# Altium PCB PlacaVGA.PcbDoc
Units mm, origin at the board's own origin, x right, y up, seen from the top; angles counter-clockwise.
Board outline 100 x 50 mm, 2 copper layers (Top Layer, Bottom Layer); 26 components, 19 nets, 97 pads, 6 vias.
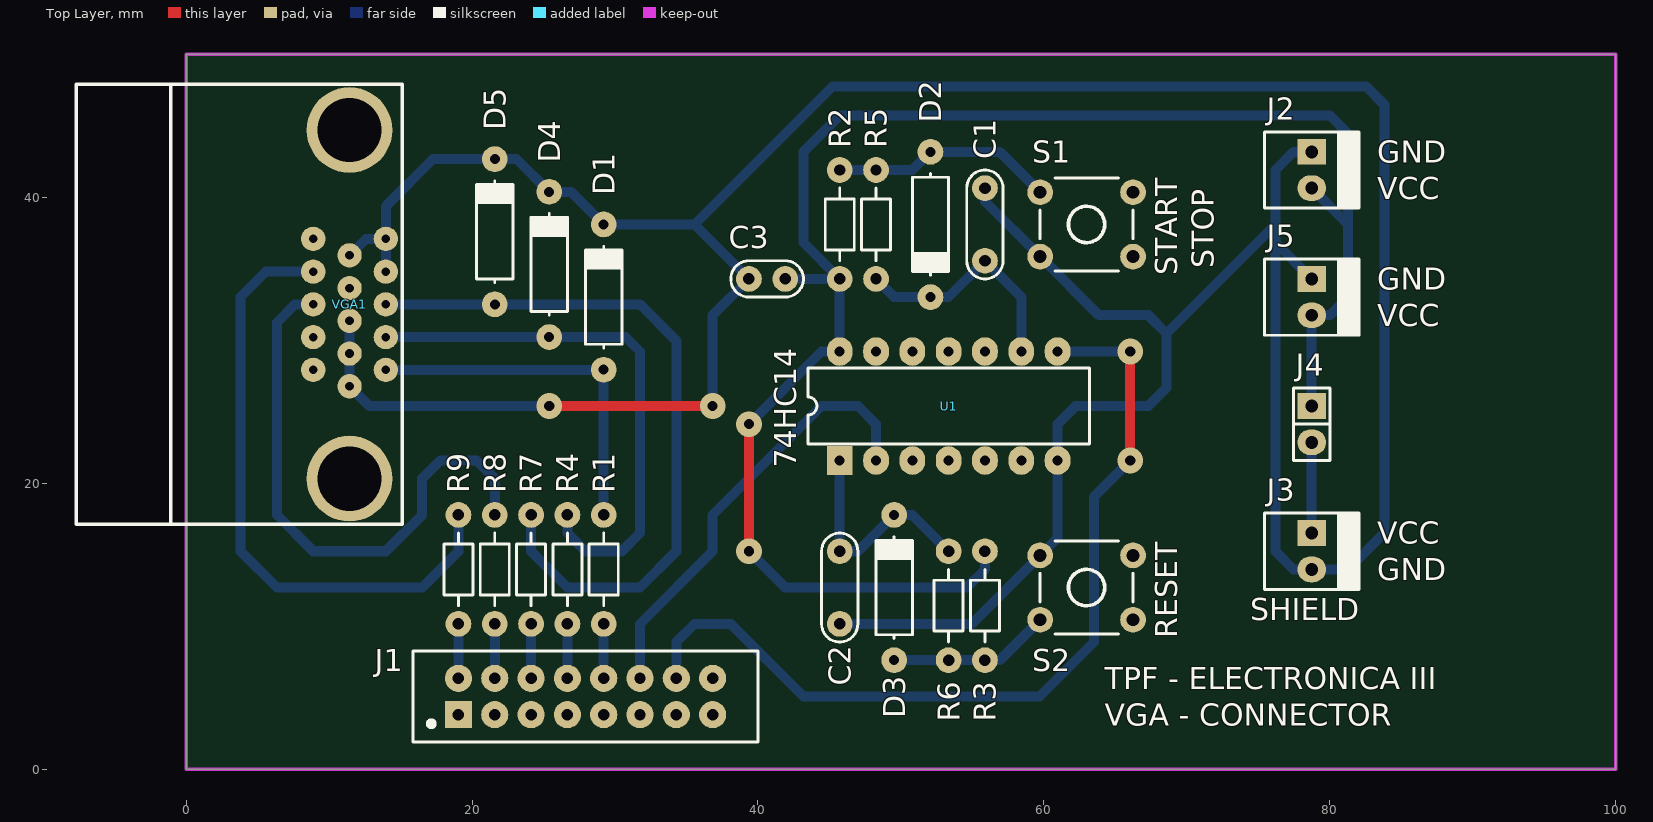
[diagram p0: Top Layer view]
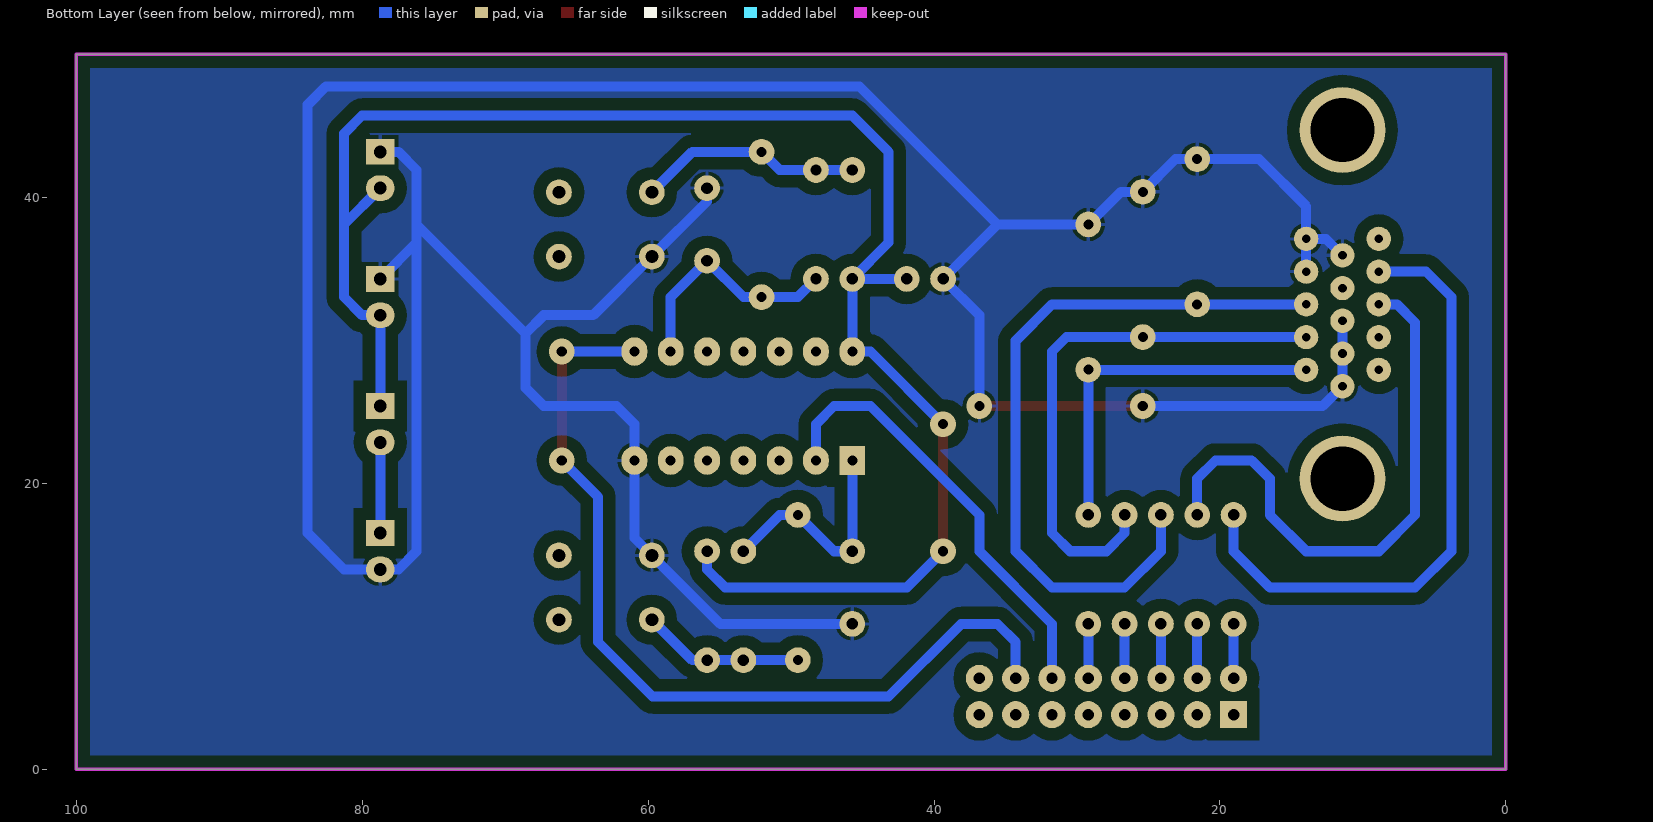
[diagram p1: Bottom Layer view, seen from below]

## Layer stack, top to bottom
Top Solder: solder mask 0.0102, Solder Resist, Dk 3.5
Top Layer: signal copper 0.0356
Dielectric 1: dielectric 0.32, FR-4, Dk 4.8
Bottom Layer: signal copper 0.0356
Bottom Solder: solder mask 0.0102, Solder Resist, Dk 3.5

## Board outline
0,0 0,50 100,50 100,0

## Design rules (kind name [scope] priority, off if disabled: settings)
Clearance [All] p1: gap=0.5
PolygonConnect [All] p1: connectstyle=Relief reliefconductorwidth=0.254 reliefentries=4 polygonreliefangle="90 Angle" airgapwidth=0.254
RoutingVias [All] p1: holewidth=0.711 width=1.8 viastyle="Through Hole" minholewidth=0.711 minwidth=1.8 maxholewidth=0.711 maxwidth=1.8
SolderMaskExpansion [All] p1: expansion=0.102
Width [All] p1: maxlimit=0.7 minlimit=0.7 preferedwidth=0.7
30 further rules are at their usual default settings.

## Components (designator, comment, footprint, x,y, rotation, side; value= is the part's Value field where it differs from the comment)
C1 "1u" CAP200 55.88,38.1 r90 top
C2 "1u" CAP200 45.72,12.7 r270 top
C3 "100n" CAP100 40.64,34.29 r180 top
D1 "1N4148" DO41 29.21,33.02 r90 top
D2 "1N4148" DO41 52.07,38.1 r270 top
D3 "1N4148" DO41 49.53,12.7 r90 top
D4 "1N4148" DO41 25.4,35.306 r90 top
D5 "1N4148" DO41 21.59,37.592 r90 top
J1 "SHIELD" SIP8*2 19.05,3.81 r0 top
J2 "FUENTE" MOLEX2 78.74,43.18 r270 top
J3 "FUENTE_2" MOLEX2 78.74,16.51 r270 top
J4 "JUMPER" JUMPER2 78.74,24.13 r270 top
J5 "EXTRA_FUENTE" MOLEX2 78.74,34.29 r270 top
R1 "1K" RES300 29.21,10.16 r90 top
R2 "56K" RES300 45.72,41.91 r270 top
R3 "56K" RES300 55.88,7.62 r90 top
R4 "1K" RES300 26.67,10.16 r90 top
R5 "22K" RES300 48.26,41.91 r270 top
R6 "22K" RES300 53.34,15.24 r270 top
R7 "1K" RES300 24.13,10.16 r90 top
R8 "100" RES300 21.59,10.16 r90 top
R9 "100" RES300 19.05,10.16 r90 top
S1 "TACT SWITCH" TACTSWITCH 62.992,38.1 r90 top
S2 "TACT SWITCH" TACTSWITCH 62.992,12.7 r90 top
U1 "MC74HC14AN" 646-06 53.34,25.4 r0 top
VGA1 "DB15" DB15_DSUB 8.89,32.512 r270 top

## Footprints (in the part's own frame and the unit in brackets; to place one, negate y for a bottom-side part, rotate by r counter-clockwise, add the part's x,y. Pads: shape width x height; smd on the part's side, far side on the other; paste and mask are expansions set on the pad)
646-06 [mm] "DIP; 14 Leads; Row Spacing 7.62 mm; Pitch 2.54 mm"
  rect 1.8x2 hole 0.7: 1(-7.62,-3.81)
  oval 1.8x2 hole 0.7: 2(-5.08,-3.81) 3(-2.54,-3.81) 4(0,-3.81) 5(2.54,-3.81) 6(5.08,-3.81) 7(7.62,-3.81) 8(7.62,3.81) 9(5.08,3.81) 10(2.54,3.81) 11(0,3.81) 12(-2.54,3.81) 13(-5.08,3.81) 14(-7.62,3.81)
  silkscreen extent -9.85,-2.65 9.85,2.65
CAP100 [mm]
  round 1.8 hole 0.813: 1(-1.27,0) 2(1.27,0)
  silkscreen extent -2.54,-1.27 2.54,1.27, body extent -2.92,-0.84 2.92,0.86, height 6.12
CAP200 [mm]
  round 1.8 hole 0.813: 1(-2.54,0) 2(2.54,0)
  silkscreen extent -3.81,-1.27 3.81,1.27, body extent -2.79,-1.17 2.79,1.12, height 6.24
DB15_DSUB [mm]
  round 6 hole 4.5: 0(-12.192,2.54) 16(12.192,2.54)
  round 1.7 hole 0.6: 1(4.58,5.08) 2(2.29,5.08) 3(0,5.08) 4(-2.29,5.08) 5(-4.58,5.08) 6(5.73,2.54) 7(3.44,2.54) 8(1.15,2.54) 9(-1.14,2.54) 10(-3.43,2.54) 11(4.58,0) 12(2.29,0) 13(0,0) 14(-2.29,0) 15(-4.58,0)
  silkscreen extent -15.39,-16.57 15.39,6.23
DO41 [mm]
  round 1.8 hole 0.7: 1(-5.08,0) 2(5.08,0)
  silkscreen extent -3.56,-1.27 3.56,1.27, body extent -5.46,-1.19 5.46,1.37, height 2.03
JUMPER2 [mm]
  rect 1.8x2 hole 0.9: 1(-1.27,0)
  oval 1.8x2 hole 0.9: 2(1.27,0)
  silkscreen extent -2.54,-1.27 2.54,1.27, body extent -2.46,-1.27 2.54,1.27, height 9.5
MOLEX2 [mm]
  rect 1.8x2 hole 0.9: 1(0,0)
  oval 1.8x2 hole 0.9: 2(2.54,0)
  silkscreen extent -1.4,-3.3 3.94,3.3, body extent -1.27,-3.18 3.81,3.18, height 10.74
RES300 [mm]
  round 1.8 hole 0.8: 1(0,0) 2(7.62,0)
  silkscreen extent 1.27,-1.02 6.35,1.02, body extent -0.25,-0.97 7.87,0.97, height 2.01
SIP8*2 [mm]
  rect 1.9x1.9 hole 0.8: 1(0,0)
  round 1.9 hole 0.8: 2(0,2.54) 3(2.54,0) 4(2.54,2.54) 5(5.08,0) 6(5.08,2.54) 7(7.62,0) 8(7.62,2.54) 9(10.16,0) 10(10.16,2.54) 11(12.7,0) 12(12.7,2.54) 13(15.24,0) 14(15.24,2.54) 15(17.78,0) 16(17.78,2.54)
  silkscreen extent -3.17,-1.91 20.95,4.44, body extent -1.26,-1.3 19.06,3.78, height 10.1
TACTSWITCH [mm]
  round 1.8 hole 0.9: 1(-2.25,-3.25) 2(-2.25,3.25) 3(2.25,-3.25) 4(2.25,3.25)
  silkscreen extent -3.25,-3.25 3.25,3.25, body extent -3.05,-3.95 3.15,3.95, height 7

## Part data
C1 C2 C3: library part CAP
D1 D2 D3 D4 D5: library part "DIODO SCHOTTKY"
J1: library part CON8*2
J2 J3 J5: library part MOLEX2
R1 R2 R3 R4 R5 R6 R7 R8 R9: library part RES
U1: "Hex Schmitt Trigger Inverter"
VGA1: "DB15 VGA Male Connector"

## Via types
v1: diameter 1.8, hole 0.711, Top Layer to Bottom Layer, 6 vias

## Nets (pads, with @x,y where several pads share a name; then routed paths per layer and width w, separated by ;. In a path a pad name is that pad's centre, name@x,y a point inside that pad or via, vN(x,y) a via of type N, cw(c..) or ccw(c..) an arc to the next point about the centre after c; other vN are vias at no path point)
B: J1.6 R7.1 | length 3.8
  Bottom Layer w0.7: J1.6 R7.1
B1: J1.14 U1.8 | length 62.4
  Top Layer w0.7: v1(66.04,21.59) v1(66.04,29.21)
  Bottom Layer w0.7: J1.14 34.29,8.89 35.56,10.16 38.1,10.16 43.18,5.08 59.69,5.08 63.5,8.89 63.5,19.05 v1(66.04,21.59) ; U1.8 v1(66.04,29.21)
B2: J1.12 U1.2 | length 31.2
  Bottom Layer w0.7: J1.12 31.75,10.16 36.83,15.24 36.83,17.78 44.45,25.4 46.99,25.4 48.26,24.13 U1.2
G: J1.8 R4.1 | length 3.8
  Bottom Layer w0.7: J1.8 R4.1
H_SYNC: J1.4 R8.1 | length 3.8
  Bottom Layer w0.7: J1.4 R8.1
NetC1_1: C1.1 D2.2 R5.2 U1.9 | length 16.6
  Bottom Layer w0.7: R5.2 49.53,33.02 D2.2 53.34,33.02 C1.1 58.42,33.02 U1.9
NetC2_1: C2.1 D3.2 R6.1 U1.1 | length 16.1
  Bottom Layer w0.7: U1.1 C2.1 46.99,15.24 D3.2 50.8,17.78 R6.1
NetD2_1: D2.1 R2.1 R5.1 S1.4 | length 15.7
  Bottom Layer w0.7: R2.1 R5.1 50.8,41.91 D2.1 56.912,43.18 S1.4
NetD3_1: D3.1 R3.1 R6.2 S2.2 | length 11.4
  Bottom Layer w0.7: D3.1 R6.2 R3.1 56.912,7.62 S2.2
NetJ3_1: J3.1 J4.2 | length 6.3
  Bottom Layer w0.7: J3.1 J4.2
R: J1.10 R1.1 | length 3.8
  Bottom Layer w0.7: J1.10 R1.1
V_SYNC: J1.2 R9.1 | length 3.8
  Bottom Layer w0.7: J1.2 R9.1
VCC: C3.1 J2.2 J4.1 J5.2 R2.2 R3.2 U1.14 | length 119.7
  Top Layer w0.7: v1(39.37,15.24) v1(39.37,24.13)
  Bottom Layer w0.7: v1(39.37,15.24) 41.91,12.7 54.61,12.7 55.88,13.97 R3.2 ; v1(39.37,24.13) 44.45,29.21 U1.14 R2.2 ; C3.1 R2.2 ; J4.1 J5.2 80.01,31.75 81.28,33.02 81.28,38.1 ; J2.2 81.28,38.1 ; R2.2 43.18,36.83 43.18,43.18 45.72,45.72 80.01,45.72 81.28,44.45 81.28,38.1
VGA_1: D1.1 R1.2 VGA1.1 | length 25.4
  Bottom Layer w0.7: VGA1.1 D1.1@29.21,27.932 ; R1.2 D1.1@29.21,27.932 ; D1.1 D1.1@29.21,27.932
VGA_2: D4.1 R4.2 VGA1.2 | length 38.3
  Bottom Layer w0.7: VGA1.2@13.974,30.226 D4.1 30.734,30.226 31.75,29.21 31.75,16.51 30.48,15.24 27.94,15.24 26.67,16.51 R4.2
VGA_3: D5.1 R7.2 VGA1.3 | length 50.9
  Bottom Layer w0.7: VGA1.3 D5.1 31.75,32.512 34.29,29.972 34.29,15.24 31.75,12.7 26.67,12.7 24.13,15.24 R7.2
VGA_4: C1.2 C2.2 C3.2 D1.2 D4.2 D5.2 J2.1 J3.2 J5.1 S1.2 S2.4 U1.7 VGA1.4 VGA1.5 VGA1.6 VGA1.7 VGA1.8 VGA1.10 | length 270
  Top Layer w0.7: v1(25.4,25.4) v1(36.83,25.4)
  Bottom Layer w0.7: VGA1.8 VGA1.7 VGA1.6 12.812,25.4 v1(25.4,25.4) ; VGA1.10 12.58,37.092 VGA1.5 ; VGA1.4 VGA1.5 ; v1(36.83,25.4) 36.83,31.75 C3.2 35.56,38.1 ; C2.2 54.952,10.16 S2.4 60.96,16.168 U1.7 60.96,24.13 62.23,25.4 67.31,25.4 68.58,26.67 68.58,30.48 ; C1.2 55.88,39.712 S1.2 63.842,31.75 67.31,31.75 68.58,30.48 ; J5.1 76.2,36.83 ; J2.1 77.47,43.18 76.2,41.91 76.2,38.1 ; VGA1.5 13.97,39.37 17.272,42.672 D5.2 23.114,42.672 D4.2 26.924,40.386 D1.2 35.56,38.1 ; 35.56,38.1 45.212,47.752 82.55,47.752 83.82,46.482 83.82,16.51 81.28,13.97 J3.2 77.47,13.97 76.2,15.24 76.2,36.83 ; 68.58,30.48 76.2,38.1 ; 76.2,36.83 76.2,38.1
VGA_13: R8.2 VGA1.13 | length 40
  Bottom Layer w0.7: VGA1.13 7.62,32.512 6.35,31.242 6.35,17.78 8.89,15.24 13.97,15.24 16.51,17.78 16.51,20.32 17.78,21.59 20.32,21.59 21.59,20.32 R8.2
VGA_14: R9.2 VGA1.14 | length 43.5
  Bottom Layer w0.7: VGA1.14 5.592,34.802 3.81,33.02 3.81,15.24 6.35,12.7 16.51,12.7 19.05,15.24 R9.2
pads on no net: J1.1 J1.3 J1.5 J1.7 J1.9 J1.11 J1.13 J1.15 J1.16 S1.1 S1.3 S2.1 S2.3 U1.3 U1.4 U1.5 U1.6 U1.10 U1.11 U1.12 U1.13 VGA1.0 VGA1.9 VGA1.11 VGA1.12 VGA1.15 VGA1.16

## Polygon pours and split planes (outlines as drawn)
VGA_4 on Bottom Layer "Top Overlay-No Net" (solid, remove dead copper, pour order 3): 0,50 100,50 100,0 0,0

## Keep-outs
Keep-Out Layer:
  the board outline again, w0.254

## Silkscreen, mask and mechanical layers (free items; w line width, h text height)
Top Overlay:
  text "GND" at 83.312,42.418 h1.52
  text "VCC" at 83.312,39.878 h1.52
  text "STOP" at 71.882,35.052 h1.52 r90
  text "START" at 69.342,34.544 h1.52 r90
  text "GND" at 83.312,33.528 h1.52
  text "VCC" at 83.312,30.988 h1.52
  text "74HC14" at 42.672,21.082 h1.52 r90
  text "VCC" at 83.312,15.748 h1.52
  text "GND" at 83.312,13.208 h1.52
  text "SHIELD" at 74.422,10.414 h1.52
  text "RESET" at 69.342,9.144 h1.52 r90
  text "TPF - ELECTRONICA III" at 64.262,5.588 h1.52
  text "VGA - CONNECTOR" at 64.262,3.048 h1.52